# Altium PCB floppy_m0dule.PcbDoc
Units mil, origin at the board's own origin, x right, y up, seen from the top; angles counter-clockwise.
Board outline 1968.5 x 1968.5 mil, 2 copper layers (Top Layer, Bottom Layer); 27 components, 33 nets, 155 pads, 1 vias.
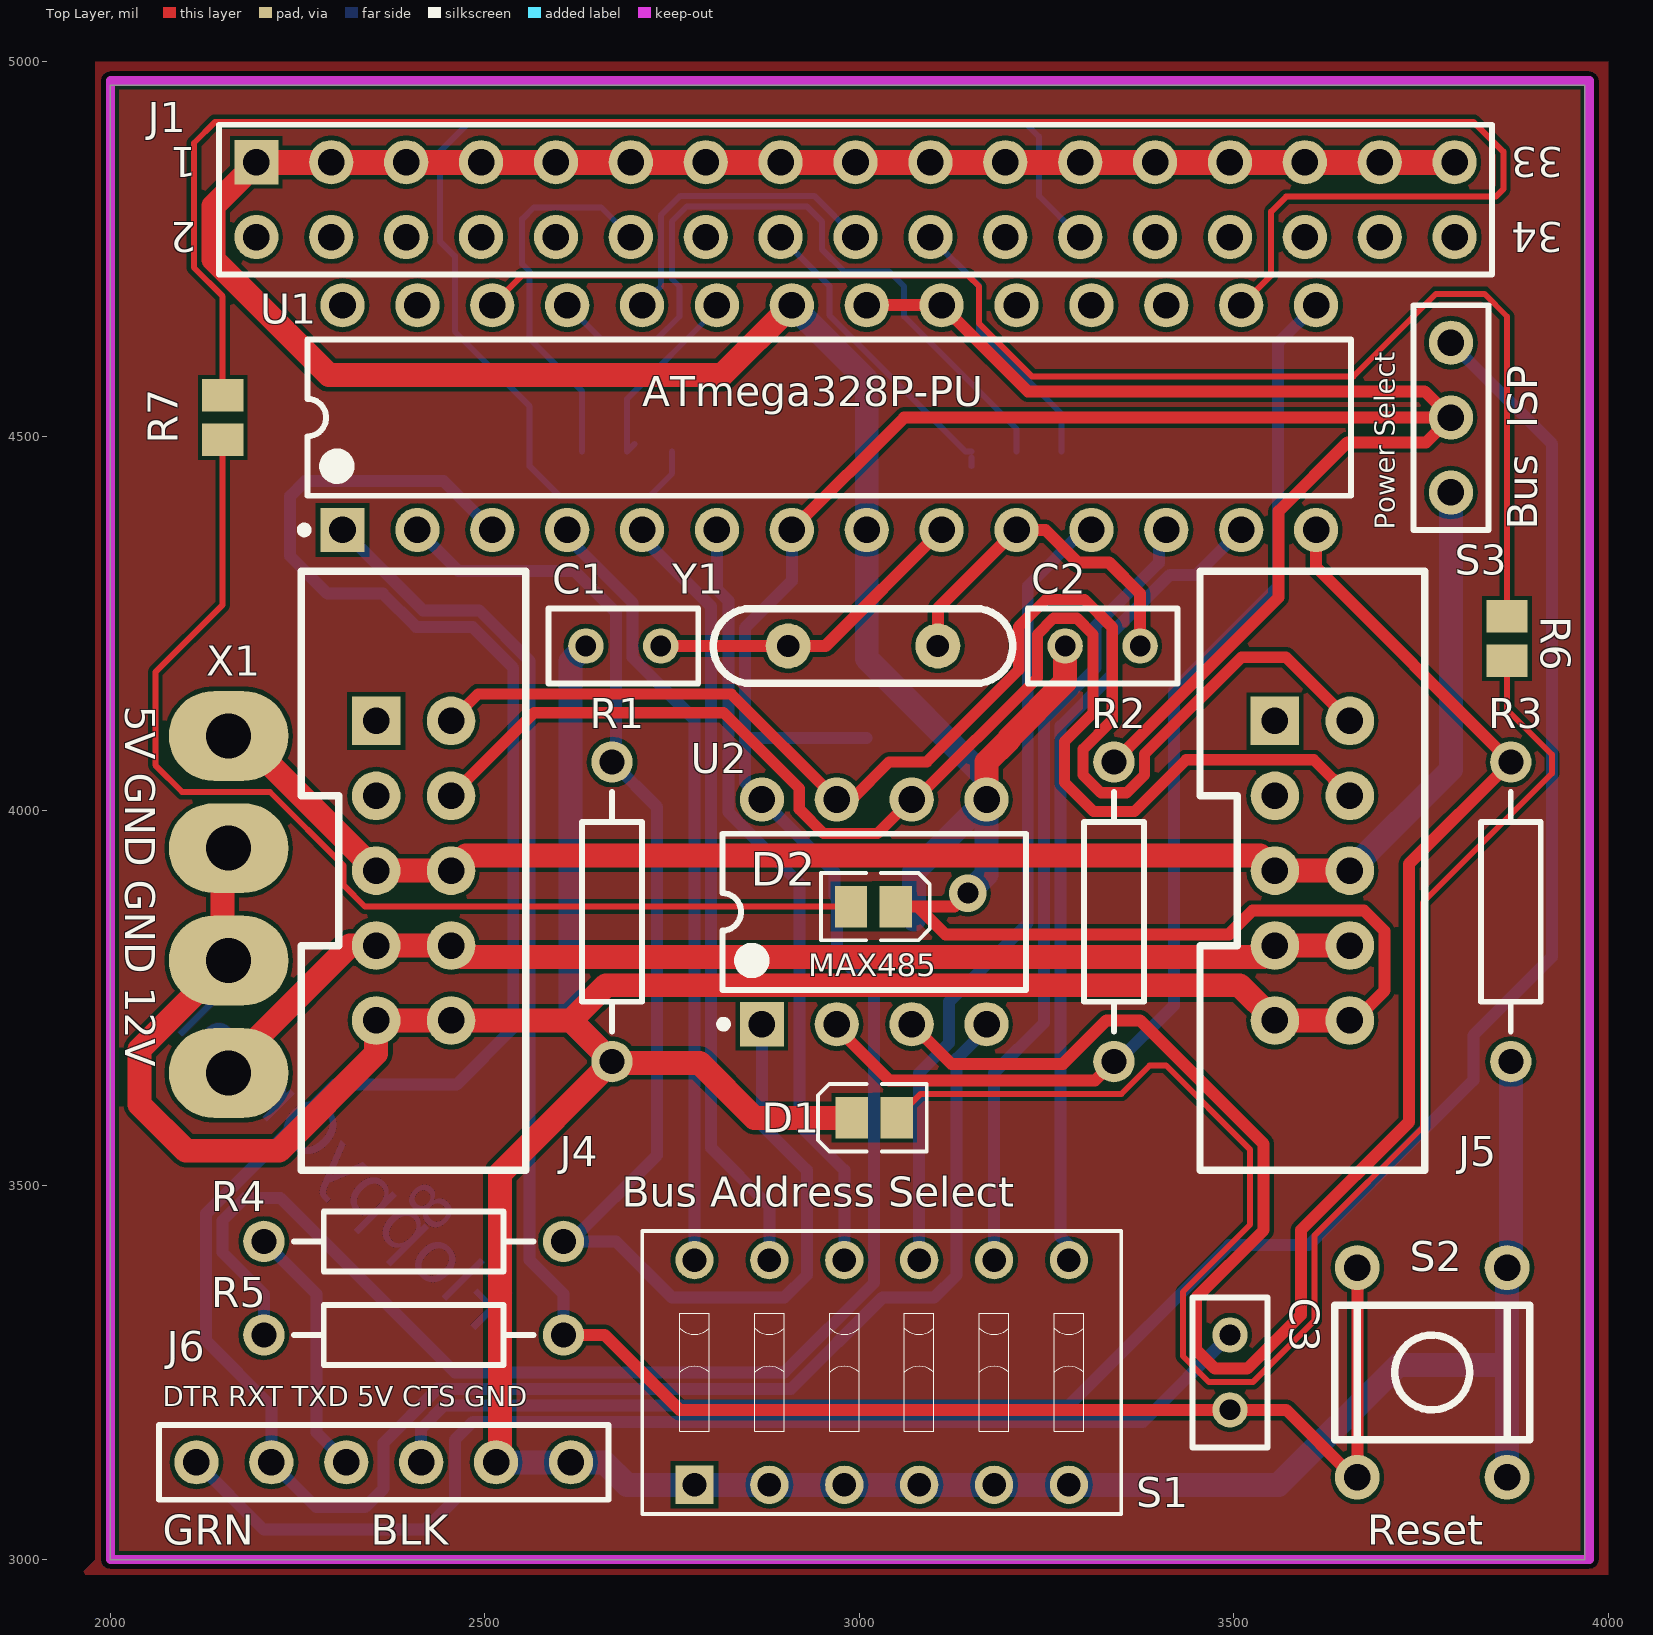
[diagram p0: Top Layer view]
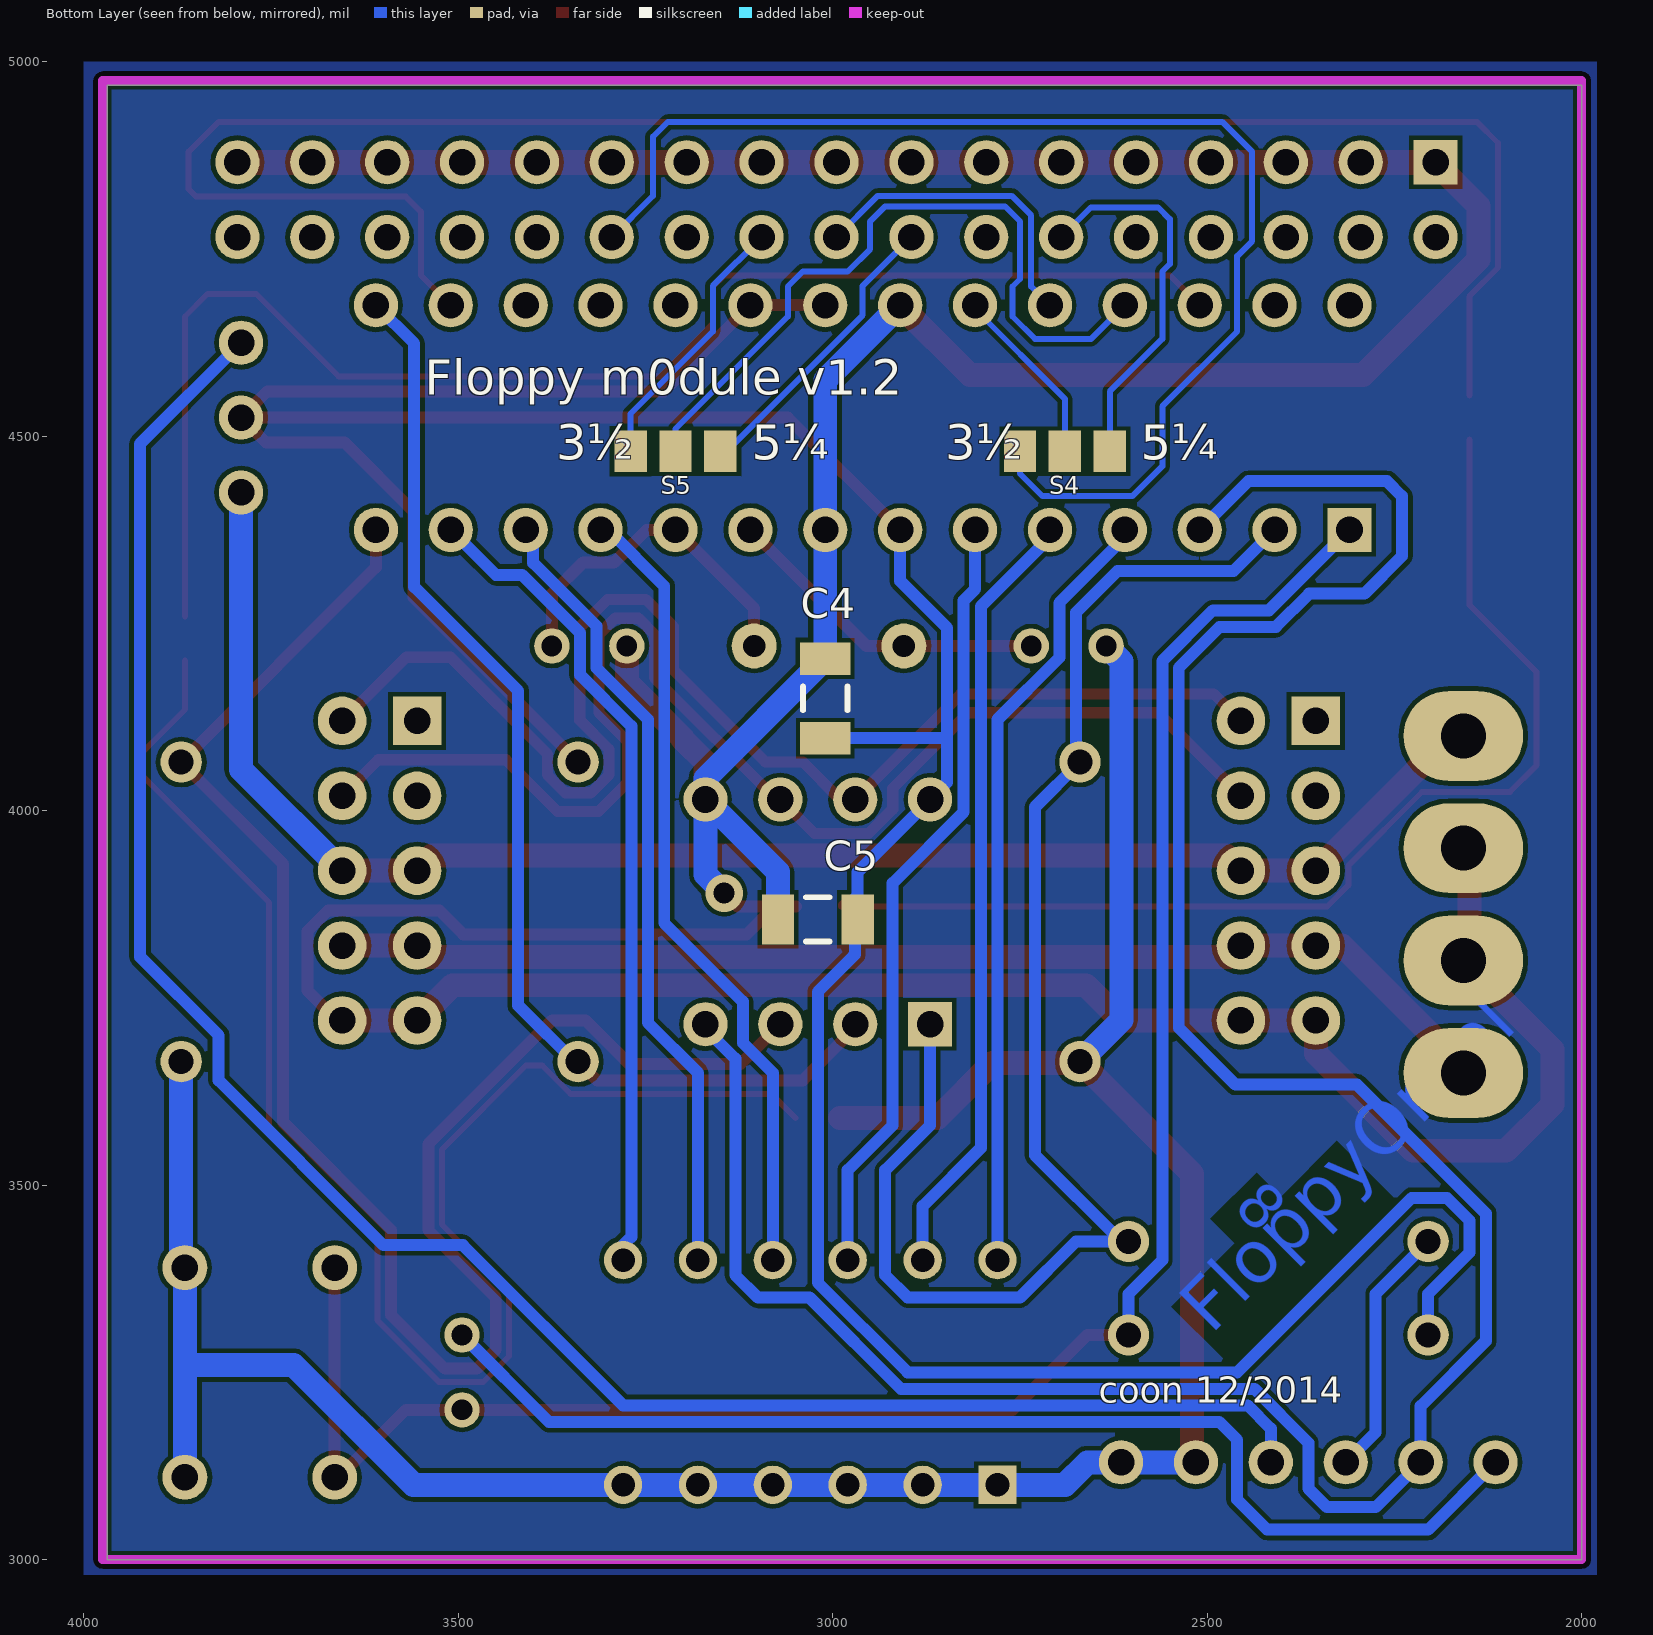
[diagram p1: Bottom Layer view, seen from below]
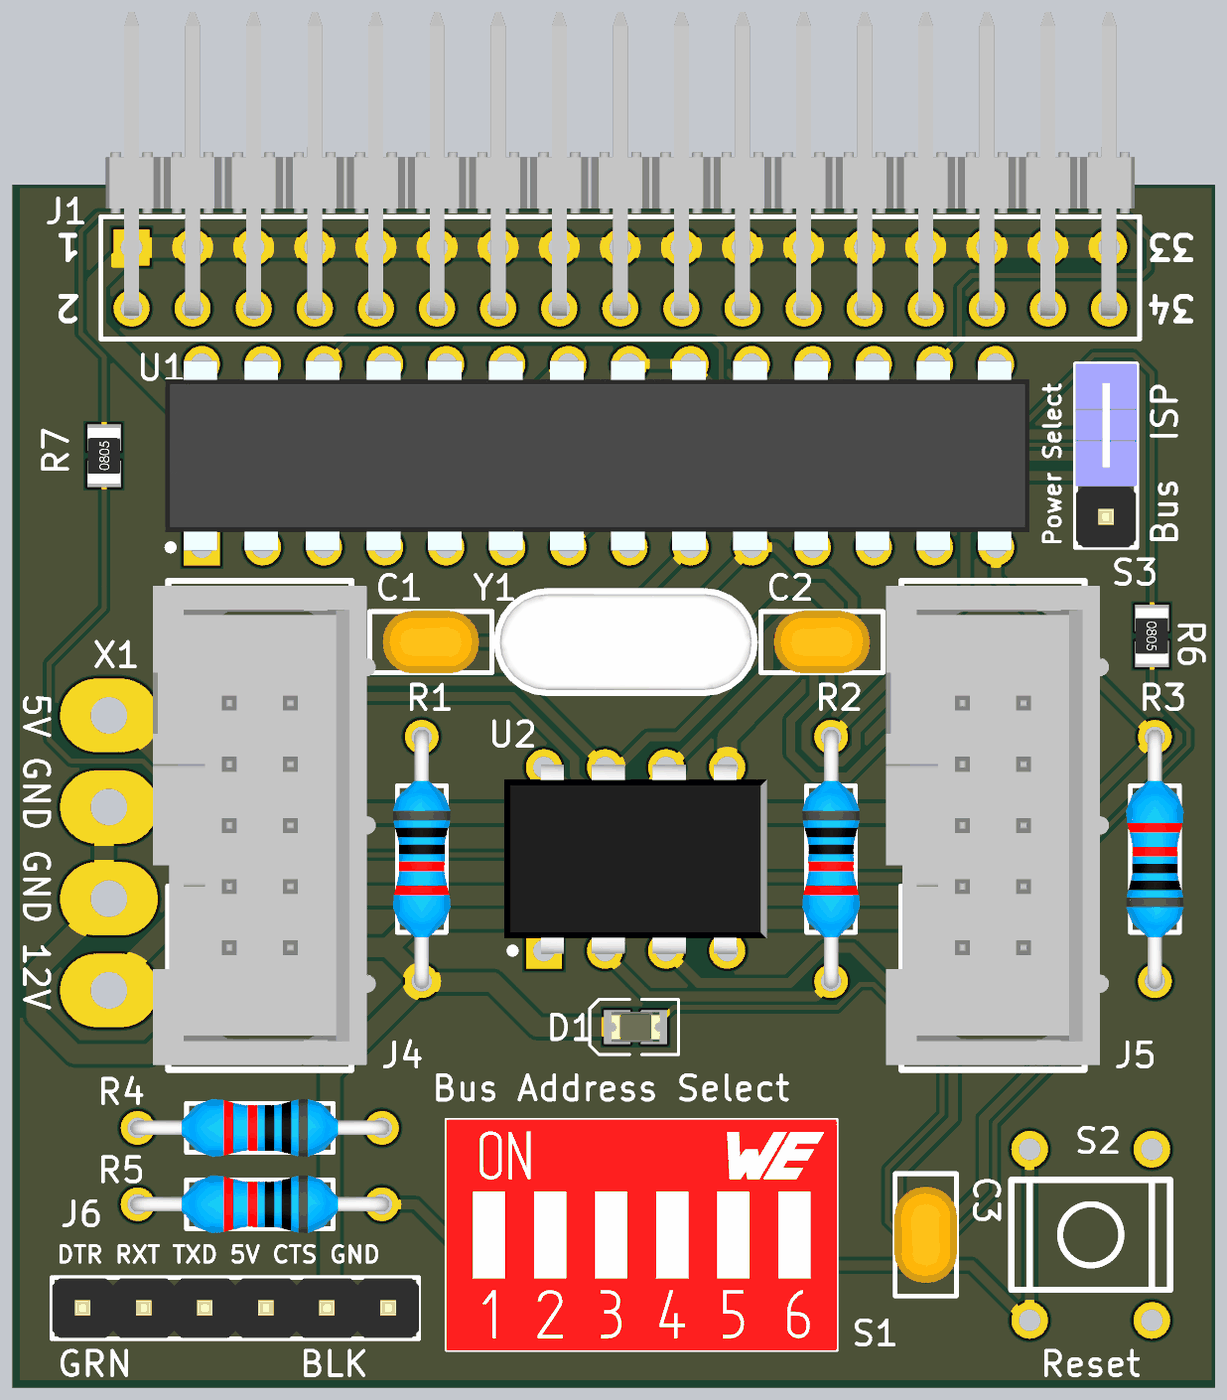
[diagram p2: 3D render of the assembled board from above, using the file's embedded part models]

## Layer stack, top to bottom
Top Solder: solder mask 0.4, Solder Resist, Dk 3.5
Top Layer: signal copper 1.4
Dielectric 1: dielectric 12.6, FR-4, Dk 4.8
Bottom Layer: signal copper 1.4
Bottom Solder: solder mask 0.4, Solder Resist, Dk 3.5

## Board outline
2000,3000 3968.5,3000 3968.5,4968.5 2000,4968.5

## Design rules (kind name [scope] priority, off if disabled: settings)
Clearance [All] p1: gap=6
DiffPairsRouting [All] p1: maxlimit=10 minlimit=10 mostfreqgap=10 toplayer_minwidth=15 toplayer_maxwidth=15 toplayer_prefwidth=15 bottomlayer_minwidth=15 bottomlayer_maxwidth=15 bottomlayer_prefwidth=15 maxuncoupledlength=500
HoleToHoleClearance [All] p1: gap=6 allowstackedmicrovias=TRUE
MinimumSolderMaskSliver [All] p1: minsoldermaskwidth=5.12
PolygonConnect [All] p1: connectstyle=Relief reliefconductorwidth=10 reliefentries=4 polygonreliefangle="90 Angle" airgapwidth=10
RoutingVias [All] p1: holewidth=31.5 width=62.99 viastyle="Through Hole" minholewidth=28 minwidth=50 maxholewidth=28 maxwidth=50
SilkToSolderMaskClearance [IsPad] p1: minsilkscreentomaskgap=7 clearancetoexposedcopper=TRUE
SolderMaskExpansion [All] p1: expansion=4
Width "Floppy Power Width" [InNetClass('Floppy Power')] p1: maxlimit=32 minlimit=16 preferedwidth=32
Width "Chip Power Width" [InNetClass('Chip Power')] p2: maxlimit=16 minlimit=16 preferedwidth=16 minimp=50.000000 maximp=50.000000 favimp=50.000000
Width [All] p3: maxlimit=24 minlimit=6 preferedwidth=16
25 further rules are at their usual default settings.

## Classes and differential pairs
net class "Chip Power": "+5V FTDI" VCC
net class "Floppy Power": "BUS +5V" "BUS +12V" GND
differential pair RS485: +RS485_P -RS485_N

## Components (designator, comment, footprint, x,y, rotation, side; value= is the part's Value field where it differs from the comment)
C1 "Cap" RAD-0.1 2685,4220 r180 top
C2 "Cap" RAD-0.1 3325,4220 r180 top
C3 "PoR Cap" RAD-0.1 3495,3250 r270 top
C4 "Buffer Cap" C1206 3010,4150 r90 bottom
C5 "Buffer Cap" C1206 3020,3855 r0 bottom
D1 "Debug" "0805 LED" 3020,3590 r180 top
D2 "Under Chip" "0805 LED" 3019,3872 r0 top
J1 "Shugart Floppy Connector" HDR2X17 3795,4866 r180 top
J4 "Floppy Bus Left" "SHROUDED PINHEADER 2X5" 2355,4120 r0 top
J5 "Floppy Bus Right" "SHROUDED PINHEADER 2X5" 3555,4120 r0 top
J6 "FTDI" HDR1X6 2115,3130 r0 top
R1 "Pulldown" AXIAL-0.4 2670,3865 r270 top
R2 "Pullup" AXIAL-0.4 3340,3865 r270 top
R3 "Pulldown" AXIAL-0.4 3870,3865 r90 top
R4 "Shortcut protection" AXIAL-0.4 2405,3425 r180 top
R5 "Pullup" AXIAL-0.4 2405,3300 r180 top
R6 "LED res" R0805 3865,4230 r270 top
R7 "LED res" R0805 2150,4525 r90 top
S1 "Bus Address Select" 418117170906 3030,3250 r0 top
S2 "SW-DPST" SWITCH 3765,3250 r180 top
S3 "Power Select Jumper" HDR1X3 3790,4425 r90 top
S4 "Drive Select Switch" "0805 SMD Switch Pads" 2660,4480 r0 bottom
S5 "Step Switch" "0805 SMD Switch Pads" 3240,4480 r180 bottom
U1 "ATmega328P-PU" 28P3 2960,4525 r90 top
U2 "MAX485" PA8 3020,3865 r90 top
X1 "Molex Connector" HDR1X4 2158,4050 r270 top
Y1 "20Mhz" CRYSTAL 3005,4220 r180 top

## Footprints (in the part's own frame and the unit in brackets; to place one, negate y for a bottom-side part, rotate by r counter-clockwise, add the part's x,y. Pads: shape width x height; smd on the part's side, far side on the other; paste and mask are expansions set on the pad)
28P3 [mm] "DIP, 28-Leads, Row Spacing 7.62mm, Pitch 2.54mm, Body 34.67x7.3mm"
  rect 1.5x1.5 hole 0.9: 1(-3.81,16.51)
  round 1.5 hole 0.9: 2(-3.81,13.97) 3(-3.81,11.43) 4(-3.81,8.89) 5(-3.81,6.35) 6(-3.81,3.81) 7(-3.81,1.27) 8(-3.81,-1.27) 9(-3.81,-3.81) 10(-3.81,-6.35) 11(-3.81,-8.89) 12(-3.81,-11.43) 13(-3.81,-13.97) 14(-3.81,-16.51) 15(3.81,-16.51) 16(3.81,-13.97) 17(3.81,-11.43) 18(3.81,-8.89) 19(3.81,-6.35) 20(3.81,-3.81) 21(3.81,-1.27) 22(3.81,1.27) 23(3.81,3.81) 24(3.81,6.35) 25(3.81,8.89) 26(3.81,11.43) 27(3.81,13.97) 28(3.81,16.51)
  silkscreen extent -3.93,-17.7 2.65,17.93, body extent -3.94,-17.91 3.94,18.03, height 4.57
"0805 LED" [mm] "0805 SMD LED"
  rect 1.1x1.4 smd: 1(-0.762,0) 2(0.762,0)
  silkscreen extent -1.78,-1.14 1.91,1.14, body extent -1.01,-0.62 1.01,0.63, height 1.1
"0805 SMD Switch Pads" [mm] "0805 SMD switch pads"
  rect 1.1x1.4 smd: 1(-0.762,0) 2(0.762,0) 3(2.286,0)
418117170906 [mm] "06p, 2.54mm Pitch, Horizontal, Box Type, THT, flat Actuator, red, without Tape, Tube"
  rect 1.3x1.3 hole 0.8: 1(-6.35,-3.81)
  round 1.3 hole 0.8: 2(-3.81,-3.81) 3(-1.27,-3.81) 4(1.27,-3.81) 5(3.81,-3.81) 6(6.35,-3.81) 7(6.35,3.81) 8(3.81,3.81) 9(1.27,3.81) 10(-1.27,3.81) 11(-3.81,3.81) 12(-6.35,3.81)
  silkscreen extent -8.12,-4.8 8.12,4.8, body extent -8.12,-4.8 8.12,4.8, height 5.4
AXIAL-0.4 [mm] "Axial Device, Thru-Hole; 2 Leads; 0.4 in Pin Spacing"
  round 1.4 hole 0.85: 1(-5.08,0) 2(5.08,0)
  silkscreen extent -4.06,-1.02 4.06,1.02, body extent -5.38,-1.2 5.38,1.2, height 2.47
C1206 [mm] "Chip Capacitor, Body 3.2x1.6mm, IPC High Density"
  rect 1.1x1.7 smd: 1(1.35,0) 2(-1.35,0)
  silkscreen extent -0.4,-0.75 0.4,0.75, body extent -1.6,-0.8 1.6,0.8, height 1.6
CRYSTAL [mil]
  round 60 hole 30: 1(-100,0) 2(100,0)
  silkscreen extent -200,-50 200,50, body extent -215,-88 217,88, height 142
HDR1X3 [mm] "Connector; Header; 3 Position"
  round 1.5 hole 0.9: 1(0,0) 2(2.54,0) 3(5.08,0)
  silkscreen extent -1.27,-1.27 6.35,1.27, body extent -1.27,-1.27 6.35,1.27, height 8.54
HDR1X4 [mil] "Connector; Header; 4 Position"
  oval 120x160 hole 60: 1(-50,0) 2(100,0) 3(250,0) 4(400,0)
HDR1X6 [mm] "Connector; Header; 6 Position"
  round 1.5 hole 0.9: 1(0,0) 2(2.54,0) 3(5.08,0) 4(7.62,0) 5(10.16,0) 6(12.7,0)
  silkscreen extent -1.27,-1.27 13.97,1.27, body extent -1.27,-1.24 13.97,1.25, height 8.54
HDR2X17 [mm] "Connector; Header; 17x2 Position"
  rect 1.5x1.5 hole 0.9: 1(40.64,0)
  round 1.5 hole 0.9: 2(40.64,2.54) 3(38.1,0) 4(38.1,2.54) 5(35.56,0) 6(35.56,2.54) 7(33.02,0) 8(33.02,2.54) 9(30.48,0) 10(30.48,2.54) 11(27.94,0) 12(27.94,2.54) 13(25.4,0) 14(25.4,2.54) 15(22.86,0) 16(22.86,2.54) 17(20.32,0) 18(20.32,2.54) 19(17.78,0) 20(17.78,2.54) 21(15.24,0) 22(15.24,2.54) 23(12.7,0) 24(12.7,2.54) 25(10.16,0) 26(10.16,2.54) 27(7.62,0) 28(7.62,2.54) 29(5.08,0) 30(5.08,2.54) 31(2.54,0) 32(2.54,2.54) 33(0,0) 34(0,2.54)
  silkscreen extent -1.27,-1.27 41.91,3.81, body extent -1.07,-9.78 41.71,2.85, height 5.79
PA8 [mm] "DIP, 8-Leads, Row Spacing 7.62mm, Pitch 2.54mm, Body 9.38x7.24mm"
  rect 1.5x1.5 hole 0.9: 1(-3.81,3.81)
  round 1.5 hole 0.9: 2(-3.81,1.27) 3(-3.81,-1.27) 4(-3.81,-3.81) 5(3.81,-3.81) 6(3.81,-1.27) 7(3.81,1.27) 8(3.81,3.81)
  silkscreen extent -3.93,-5.15 2.65,5.23, body extent -3.93,-5.46 3.94,5.46, height 5.08
R0805 [mm] "Chip Capacitor, Body 2.0x1.3mm, IPC High Density"
  rect 1.1x1.4 smd: 1(-0.75,0) 2(0.75,0)
  body extent -1.15,-0.67 1.15,0.68, height 0.76
RAD-0.1 [mm] "Radial Cap, Thru-Hole; 2 Leads; 0.1 in Pin Spacing"
  round 1.2 hole 0.7: 1(-1.27,0) 2(1.27,0)
  silkscreen extent -2.54,-1.27 2.54,1.27, body extent -2,-1.31 2,1.3, height 7.46
"SHROUDED PINHEADER 2X5" [mil] "2x5 Shrouded Pinheader"
  rect 65x65 hole 35.43: 1(0,0)
  round 65 hole 35.43: 2(100,0) 3(0,-100) 4(100,-100) 5(0,-200) 6(100,-200) 7(0,-300) 8(100,-300) 9(0,-400) 10(100,-400)
  silkscreen extent -100,-600 200,200, body extent -125,-592 240,192, height 367
SWITCH [mil]
  round 60 hole 35.43: 1(100,-140) 2(-100,-140) 3(100,140) 4(-100,140)
  silkscreen extent -130,-90 130,90

## Part data
C1 C2: "Capacitor"
C3: library part Cap, "Capacitor"
C4 C5: library part "Cap Semi", "Capacitor (Semiconductor SIM Model)"
D1 D2: library part LED3, "Typical BLUE SiC LED"
J1: library part "Header 17X2", "Header, 17-Pin, Dual row"
J4 J5: library part "Floppy Bus Connector", "10 Pin Floppy bus connector for rainbow cable"
J6: library part "Header 6", "Header, 6-Pin"
R1 R2 R3 R4 R5: library part Res2, "Resistor"
R6: library part Res2, "Resistor for Green LED 19.33mA @ 5V"
R7: library part Res2, "Resistor for Blue LED 17.5mA @ 5V"
S1: library part "SW DIP-6", "Midi Channel Select"
S2: "Double-Pole, Single-Throw Switch"
S3: library part "Header 3H", "Header, 3-Pin, Right Angle"
S4 S5: library part "Header 3", "Header, 3-Pin"
U1: "8-bit AVR Microcontroller, 32KB Flash, 1KB EEPROM, 2KB SRAM, 28-pin PDIP, Industrial Grade (-40°C to 85°C)"
U2: library part MAX485EPA, "Low-Power, Slew-Rate-Limited RS-485/RS-422 Transceiver"
X1: "Molex Power Supply Connector"
Y1: library part XTAL, "Crystal Oscillator"

## Via types
v1: diameter 50, hole 28, Top Layer to Bottom Layer, 1 vias

## Nets (pads, with @x,y where several pads share a name; then routed paths per layer and width w, separated by ;. In a path a pad name is that pad's centre, name@x,y a point inside that pad or via, vN(x,y) a via of type N, cw(c..) or ccw(c..) an arc to the next point about the centre after c; other vN are vias at no path point)
"3.5\" DS": J1.12 S4.1 | length 510.9
  Bottom Layer w8: S4.1 2630,4560 2560,4630 2560,4720 2550,4730 2550,4790 2565.53,4805.53 2655.47,4805.53 J1.12
"3.5\" STEP": J1.20 S5.1 | length 358.5
  Bottom Layer w8: J1.20 3160,4701 3160,4640 3270,4530 S5.1
"5.25\" DS": J1.24 S4.3 | length 1700.3
  Bottom Layer w8: S4.3 2750,4450 2720,4420 2600,4420 2560,4460 2560,4540 2460,4640 2460,4740.57 2440,4760.57 2440,4880 2480,4920 3220,4920 3240,4900 3240,4821 J1.24
"5.25\" STEP": J1.16 S5.3 | length 408.2
  Bottom Layer w8: J1.16 2960,4701 2960,4661.77 3141.77,4480 S5.3 ; S5.3@3150,4460 S5.3@3150,4471.77
"+5V FTDI": J6.4 S3.3 | length 2727
  Bottom Layer w16: J6.4 2415,3175 2446,3206 3280,3206 3494,3420 3600,3420 3820,3640 3820,3700 3925,3805 3925,4490 S3.3
"BUS +5V": J4.5 J4.6 J5.5 J5.6 S3.1 X1.1 | length 2184.7
  Top Layer w32: X1.1@2150,4100 X1.1@2154,4096 ; X1.1 2175,4100 J4.5 J4.6 ; J4.6@2455,3935 J4.6 ; J5.5@3555,3935 J5.5 ; J5.6 J5.5 ; J4.6 2475,3940 3535,3940 J5.5
  Bottom Layer w32: J5.6 3790,4055 S3.1
"BUS +12V": J4.7 J4.8 J5.7 J5.8 X1.4 | length 1587.8
  Top Layer w32: X1.4@2150,3650 2320,3820 J4.7 J4.8 2470,3805 3540,3805 J5.7 J5.8
DIP-1: S1.12 U1.4 | length 1049.6
  Bottom Layer w16: U1.4@2600,4375 2697.38,4277.62 2697.38,4204.42 2780,4121.79 S1.12
DIP-2: S1.11 U1.5 | length 1049.6
  Bottom Layer w16: U1.5@2700,4375 2700,4374.89 2802,4272.89 2802,3550 2880,3472 S1.11
DIP-3: S1.10 U1.6 | length 1052.5
  Bottom Layer w16: U1.6@2800,4375 U1.6@2805,4370 ; U1.6 2810,4296 2825.19,4280.81 2825.19,3998.25 2920,3903.44 2920,3580 2980,3520 S1.10
DIP-4: S1.9 U1.11 | length 1066.1
  Bottom Layer w16: S1.9 3080,3650 3120,3690 3120,3745 3225,3850 3225,4300 U1.11@3300,4375
DIP-5: S1.8 U1.12 | length 1071.1
  Bottom Layer w16: S1.8 3180,3650 3247,3717 3247,4122 3315.38,4190.38 3315.38,4246.49 3400,4331.11 U1.12@3400,4380
DIP-6: S1.7 U1.13 | length 1099.9
  Bottom Layer w16: S1.7 3280,3420 3269,3431 3269,4112.89 3337.38,4181.27 3337.38,4237.38 3415,4315 3450,4315 U1.13
GND: C1.2 C2.2 C4.1 C5.1 D1.2 D2.2 J1.1 J1.3 J1.5 J1.7 J1.9 J1.11 J1.13 J1.15 J1.17 J1.19 J1.21 J1.23 J1.25 J1.27 J1.29 J1.31 J1.33 J4.9 J4.10 J5.9 J5.10 J6.5 J6.6 R1.2 R3.1 S1.1 S1.2 S1.3 S1.4 S1.5 S1.6 S2.2 S2.4 U1.8 U1.22 U2.5 X1.2 X1.3 | length 12242
  Top Layer w16: D2.2 3078,3872 ; v1(3145,3890) 3127,3872 3078,3872 ; J5.10 3661.5,3720 3701.5,3760 3701.5,3839.26 3674.26,3866.5 3525,3866.5 3493.5,3835 3115,3835 3078,3872
  Top Layer w32: X1.3@2150,3800 X1.2@2150,3950 ; X1.3 2039,3681 2039,3608 2101,3546 2225,3546 2355,3676 J4.9 J4.10 2615,3720 ; J1.1 J1.3 J1.5 J1.7 J1.9 J1.11 J1.13 J1.15 J1.17 J1.19 J1.21 J1.23 J1.25 J1.27 J1.29 J1.31 3794,4866 3795,4865 2195,4865 2137.66,4807.66 2137.66,4735.93 2291.79,4581.79 2816.79,4581.79 U1.22 ; J6.5@2520,3130 2520,3515 R1.2 ; D1.2@2990.47,3590 2860,3590 2786.53,3663.47 2671.53,3663.47 R1.2 ; U2.5 3170,4065 3200.5,4095.5 3200.5,4097.22 3275,4171.72 C2.2 ; J5.10 J5.9 3508,3767 2662,3767 2615,3720 ; 2615,3720 R1.2
  Bottom Layer w32: J6.5 J6.6@2610,3130 ; J6.6 2660,3130 2690,3100 S1.1@2770,3100 ; C1.2 2614.63,4199.63 2614.63,3720.37 R1.2 ; S1.1 S1.2 S1.3 S1.4 S1.5 S1.6 3560,3100 3720,3260 3865,3260 ; U1.22 3010,4575 U1.8 C4.1 3170,4043.15 U2.5 ; C5.1@3073.15,3855 3073.15,3918.15 U2.5 ; v1(3145,3890) 3170,3915 U2.5 ; S2.4 3865,3385 3870,3390 R3.1
NetC1_1: C1.1 U1.9 Y1.2 | length 439.2
  Top Layer w16: C1.1@2730,4220 Y1.2 ; Y1.2@2910,4220 2955,4220 U1.9
NetC2_1: C2.1 U1.10 Y1.1 | length 468.7
  Top Layer w16: Y1.1 3105,4270 U1.10 3248.44,4375 3291.97,4331.47 3333.53,4331.47 3375,4290 C2.1
NetC3_1: C3.1 J6.1 | length 1571.8
  Bottom Layer w16: J6.1 2205,3040 2420,3040 2460,3080 2460,3160 2484,3184 3379,3184 C3.1
NetC3_2: C3.2 R5.1 S2.1 S2.3 U1.1 | length 2670.4
  Top Layer w16: R5.1 2660,3300 2760,3200 C3.2 3570,3200 3660,3110 3670,3110 3665,3115 S2.1
  Bottom Layer w16: U1.1 2417.5,4267.5 2492.5,4267.5 2560,4200 2560,3400 2605,3355 R5.1 R5.1@2602.5,3302.5
NetD1_1: D1.1 R6.2 | length 2122
  Top Layer w8: D1.1 3082,3622 3350.12,3622 3387.89,3659.77 3409.77,3659.77 3522,3547.54 3522,3447.46 3432,3357.46 3432,3272 3467,3237 3525.46,3237 3608,3319.54 3608,3433 3752.73,3577.73 3752.73,3877.73 3925,4050 3925,4075 3865,4135 R6.2
NetD2_1: D2.1 R7.1 | length 1497.9
  Top Layer w8: R7.1 2150,4275 2060,4185 2060,4061 2096,4025 2213.23,4025 2311.5,3926.73 2311.5,3900.5 2340,3872 D2.1 ; D2.1@2986.5,3877.5 D2.1@2989,3875
NetJ1_18: J1.18 U1.24 | length 423.9
  Bottom Layer w8: U1.24 2735,4700 2735,4795 2761,4821 2940,4821 J1.18
NetJ6_2: J6.2 U1.3 U2.4 | length 3572.4
  Top Layer w16: J6.2 J6.2@2230,3130
  Bottom Layer w16: U1.3 2445,4440 2260,4440 2240,4420 2240,4340 2290,4290 2363.89,4290 2408.39,4245.5 2483.39,4245.5 2538,4190.89 2538,3710 2462.23,3634.23 2300,3634.23 2128,3462.23 2128,3292 2215,3205 J6.2 2275,3070 2340,3070 2365,3095 2365,3156.11 2436.89,3228 2909.11,3228 3031.11,3350 3100,3350 3130,3380 3130,3668.89 3170,3708.89 U2.4@3170,3710
NetJ6_3: J6.3 R4.2 | length 340.6
  Bottom Layer w16: R4.2 2275,3355 2275,3170 J6.3
NetR1_1: R1.1 R4.1 U1.2 U2.1 | length 1944
  Bottom Layer w16: U1.2 2465,4320 2620,4320 2675.38,4264.62 R1.1@2675.38,4074.62 ; R4.1 R4.1@2615,3425 ; R4.1@2610,3420 R4.1@2615,3425 ; R1.1 2730,4005 2730,3540 R4.1@2615,3425 ; U2.1@2870,3710 2870,3580 2930,3520 2930,3380 2900,3350 2750,3350 2675,3425 R4.1@2615,3425
NetR2_2: R2.2 U1.15 U2.2 | length 1536.2
  Top Layer w16: U2.2@2970,3710 3040,3640 3315,3640 R2.2
  Bottom Layer w16: R2.2@3340,3660 3420,3740 3420,4160 3559,4299 3559,4624 U1.15
NetR3_2: R3.2 U1.14 U2.3 | length 2353.5
  Top Layer w16: U2.3 3123,3662 3272,3662 3330,3720 3375,3720 3540,3555 3540,3440 3450,3350 3450,3280 3475,3255 3518,3255 3590,3327 3590,3440.46 3734,3584.46 3734,3929 R3.2 3610,4325 U1.14
  Bottom Layer w16: R3.2@3880,4060 R3.2@3880,4065
NetR6_1: R6.1 U1.26 | length 1914.6
  Top Layer w8: U1.26 2549.53,4714.53 3145.47,4714.53 3160,4700 3160,4650.46 3230.46,4580 3660,4580 3770,4690 3835,4690 3865,4660 R6.1
NetR7_2: R7.2 U1.16 | length 2643.7
  Top Layer w8: R7.2 2150,4686.82 2111.66,4725.16 2111.66,4891.66 2140,4920 3820,4920 3860,4880 3860,4830 3850,4820 3570,4820 3550,4800 3550,4715 U1.16
NetS4_2: S4.2 U1.23 | length 258.8
  Bottom Layer w8: S4.2@2700,4490 S4.2 2690,4550 2810,4670 U1.23
NetS5_2: S5.2 U1.25 | length 978.6
  Bottom Layer w8: U1.25 2655,4630 2730,4630 2760,4660 2760,4700 2750,4710 2750,4787 2770,4807 2930,4807 2950,4787 2950,4750 2980,4720 3040,4720 3060,4700 3060,4660 3210,4510 S5.2
RS485_N: J4.2 J5.2 U2.7 | length 1821.7
  Top Layer w15: J4.2 2491,4156 2829,4156 U2.7 2990,4015 3040,4065 3090,4065 3212.88,4187.88 3212.88,4245.73 3249.27,4282.12 3300.73,4282.12 3337.88,4244.98 3337.88,4120.94 3298.94,4082.01 3298.94,4047.99 3322.99,4023.94 3357.01,4023.94 3381.06,4047.99 3381.06,4075.65 3510.41,4205 3570,4205 J5.2
RS485_P: J4.4 J5.4 U2.6 | length 1807.4
  Top Layer w15: J4.4 2566,4131 2818.64,4131 2920,4029.64 2920,4001.97 2952.47,3969.5 3024.5,3969.5 U2.6 3075.36,4015 3237.88,4177.52 3237.88,4235.38 3259.62,4257.12 3290.38,4257.12 3312.12,4235.38 3312.12,4130.54 3273.94,4092.36 3273.94,4037.64 3312.64,3998.94 3367.36,3998.94 3436.42,4068 3607,4068 J5.4
VCC: C4.2 C5.2 R2.1 R5.2 S3.2 U1.7 U1.20 U1.21 U2.8 | length 4962.9
  Top Layer w16: U1.7 3060,4525 S3.2 ; U1.21 U1.20 3225,4560 3755,4560 S3.2 ; R2.1 3560,4285 3560,4400 3652,4492 3757,4492 S3.2
  Bottom Layer w16: R5.2 2205,3355 2150,3410 2150,3453.12 2180,3483.12 2226.88,3483.12 2460,3250 2900,3250 3020,3370 3020,3758.15 2970,3808.15 ; U1.7 2910,4306.76 2847.19,4243.95 2847.19,4100 ; 2970.92,3809.08 2970,3810 2970,3883.43 2966.85,3886.57 2966.85,3918.15 U2.8 2847.19,4037.81 2847.19,4100 ; C4.2 2850.34,4096.85 2847.19,4100
pads on no net: J1.2 J1.4 J1.6 J1.8 J1.10 J1.14 J1.22 J1.26 J1.28 J1.30 J1.32 J1.34 J4.1 J4.3 J5.1 J5.3 U1.17 U1.18 U1.19 U1.27 U1.28

## Polygon pours and split planes (outlines as drawn)
no net on Top Layer "Bottom Overlay-No Net" (solid, pour order 8): 1980,5000 4000,5000 4000,2980 1960,2980 1980,3000 1980,5000
no net on Bottom Layer "Bottom Overlay-No Net" (solid, pour order 10): 1980,5000 4000,5000 4000,2980 1980,2980 1980,5000

## Keep-outs
Keep-Out Layer:
  lines w11.81: 2000,3000 2000,4975 3975,4975 3975,3000 2000,3000

## Other copper
Bottom Layer:
  text "8" at 2480,3456 h100 r45
  text "FloppyOrgel" at 2478,3283 h120 r315

## Silkscreen, mask and mechanical layers (free items; w line width, h text height)
Top Overlay:
  text "Power Select" at 3715,4375 h27 r90
  text "Bus  ISP" at 3905,4375 h40 r90
  text "5V GND GND 12V" at 2020,4140 h40 r270
  text "DTR RXT TXD 5V CTS GND" at 2070,3205 h27
  text "GRN         BLK" at 2070,3020 h40
  text "Reset" at 3678.36,3020 h40
Bottom Overlay:
  text "Floppy m0dule v1.2" at 3545,4540 h80
  text "5¼" at 2589,4453 h80
  text "3½" at 2850,4453 h80
  text "5¼" at 3108,4453 h80
  text "3½" at 3369,4453 h80
  text "coon 12/2014" at 2645,3198 h59.06
Bottom Solder:
  text "8" at 2480,3456 h100 r45
  text "FloppyOrgel" at 2478,3283 h120 r315

## Dimensions
2000,3000 to 2000,4975 on Mechanical 1
2000,3000 to 3975,3000 on Mechanical 1

## Text inside footprints (layer, text, board x,y; h text height)
J1: Top Overlay "34" at 3940,4786 h40 r180; Top Overlay "33" at 3940,4886 h40 r180; Top Overlay "1" at 2115,4886 h40 r180; Top Overlay "2" at 2115,4786 h40 r180